# Altium PCB STRWL-P01-V01-3V3Plane.PcbDoc
Units mm, origin at the board's own origin, x right, y up, seen from the top; angles counter-clockwise.
Board outline 66.42 x 78.1 mm, 2 copper layers (Top Layer, Bottom Layer); 108 components, 76 nets, 391 pads, 110 vias.
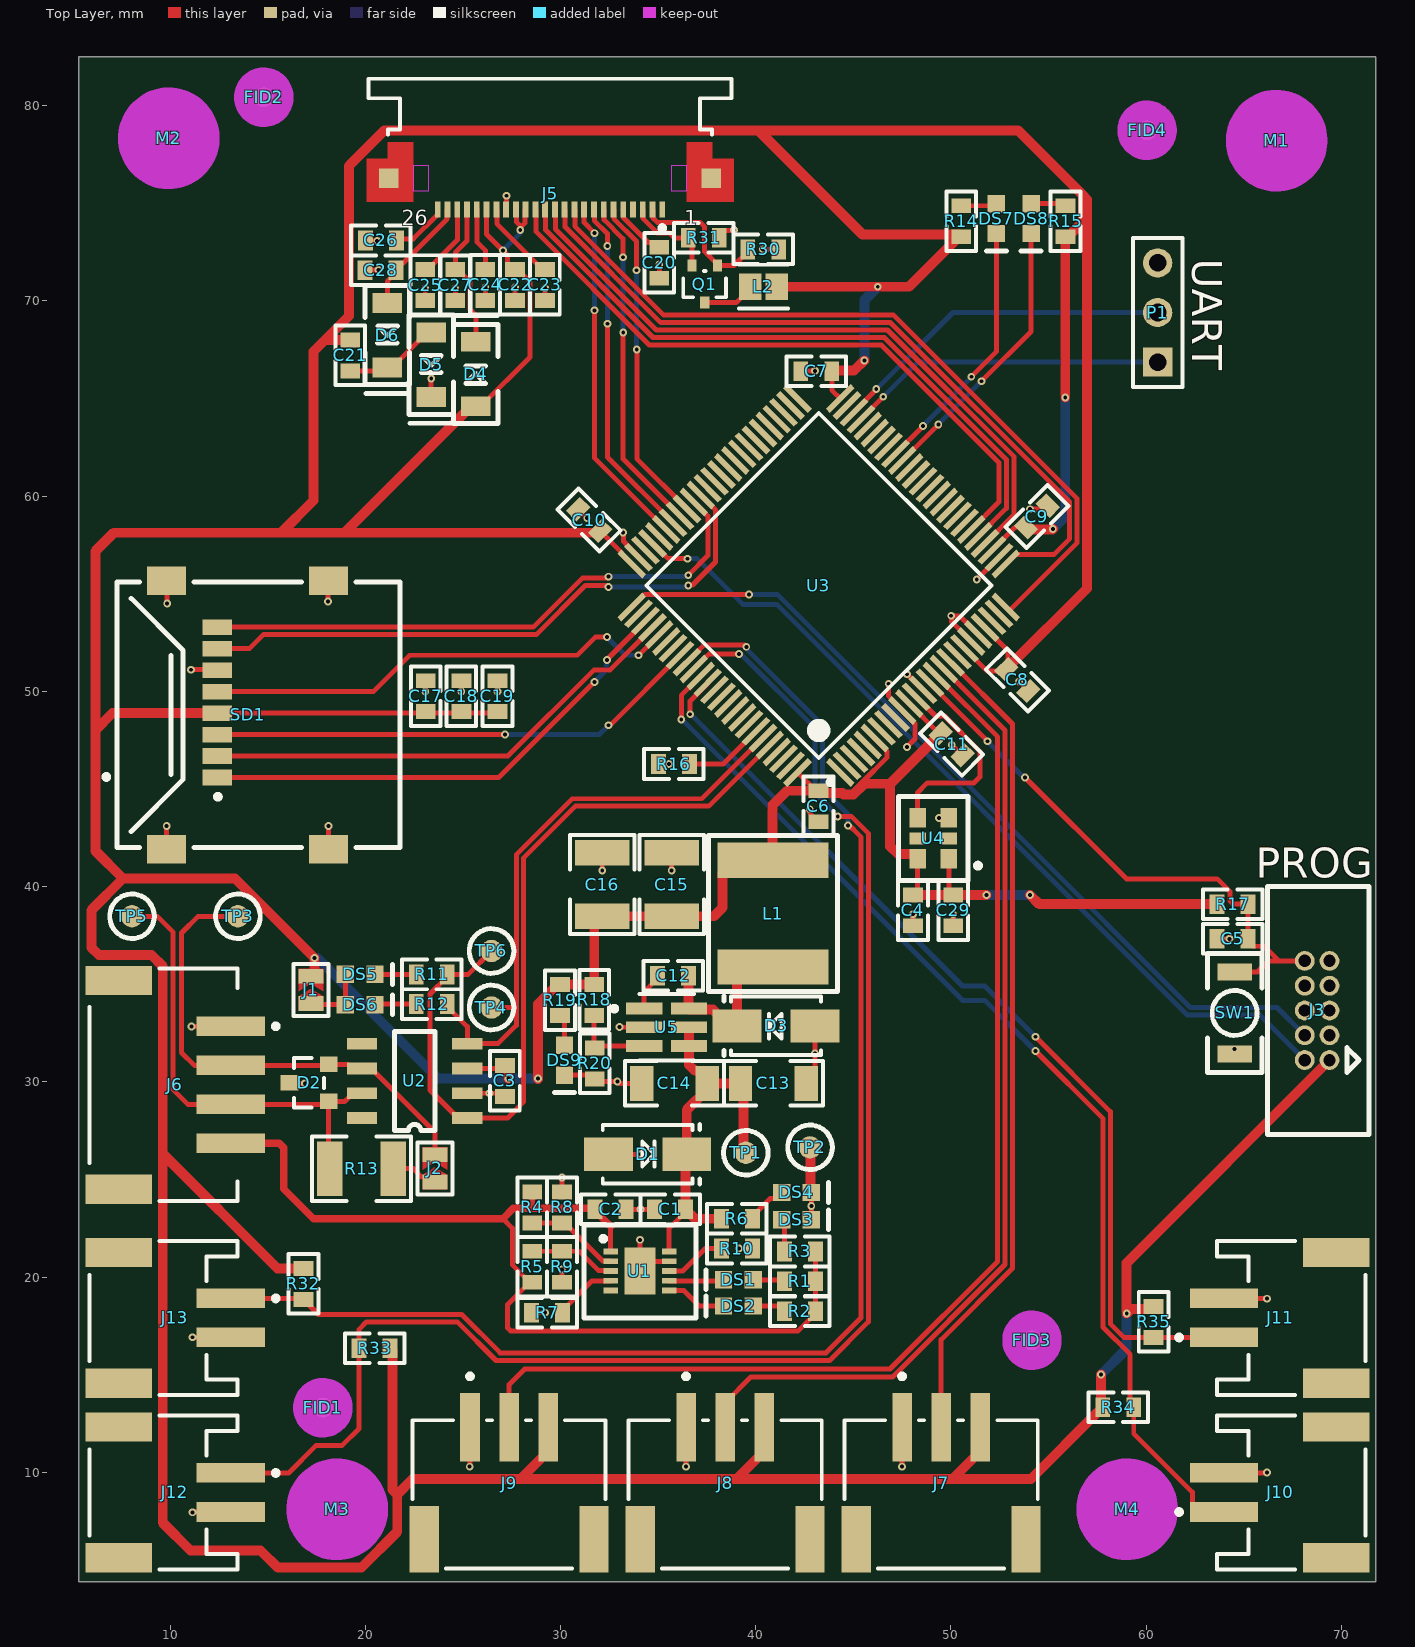
[diagram p0: Top Layer view]
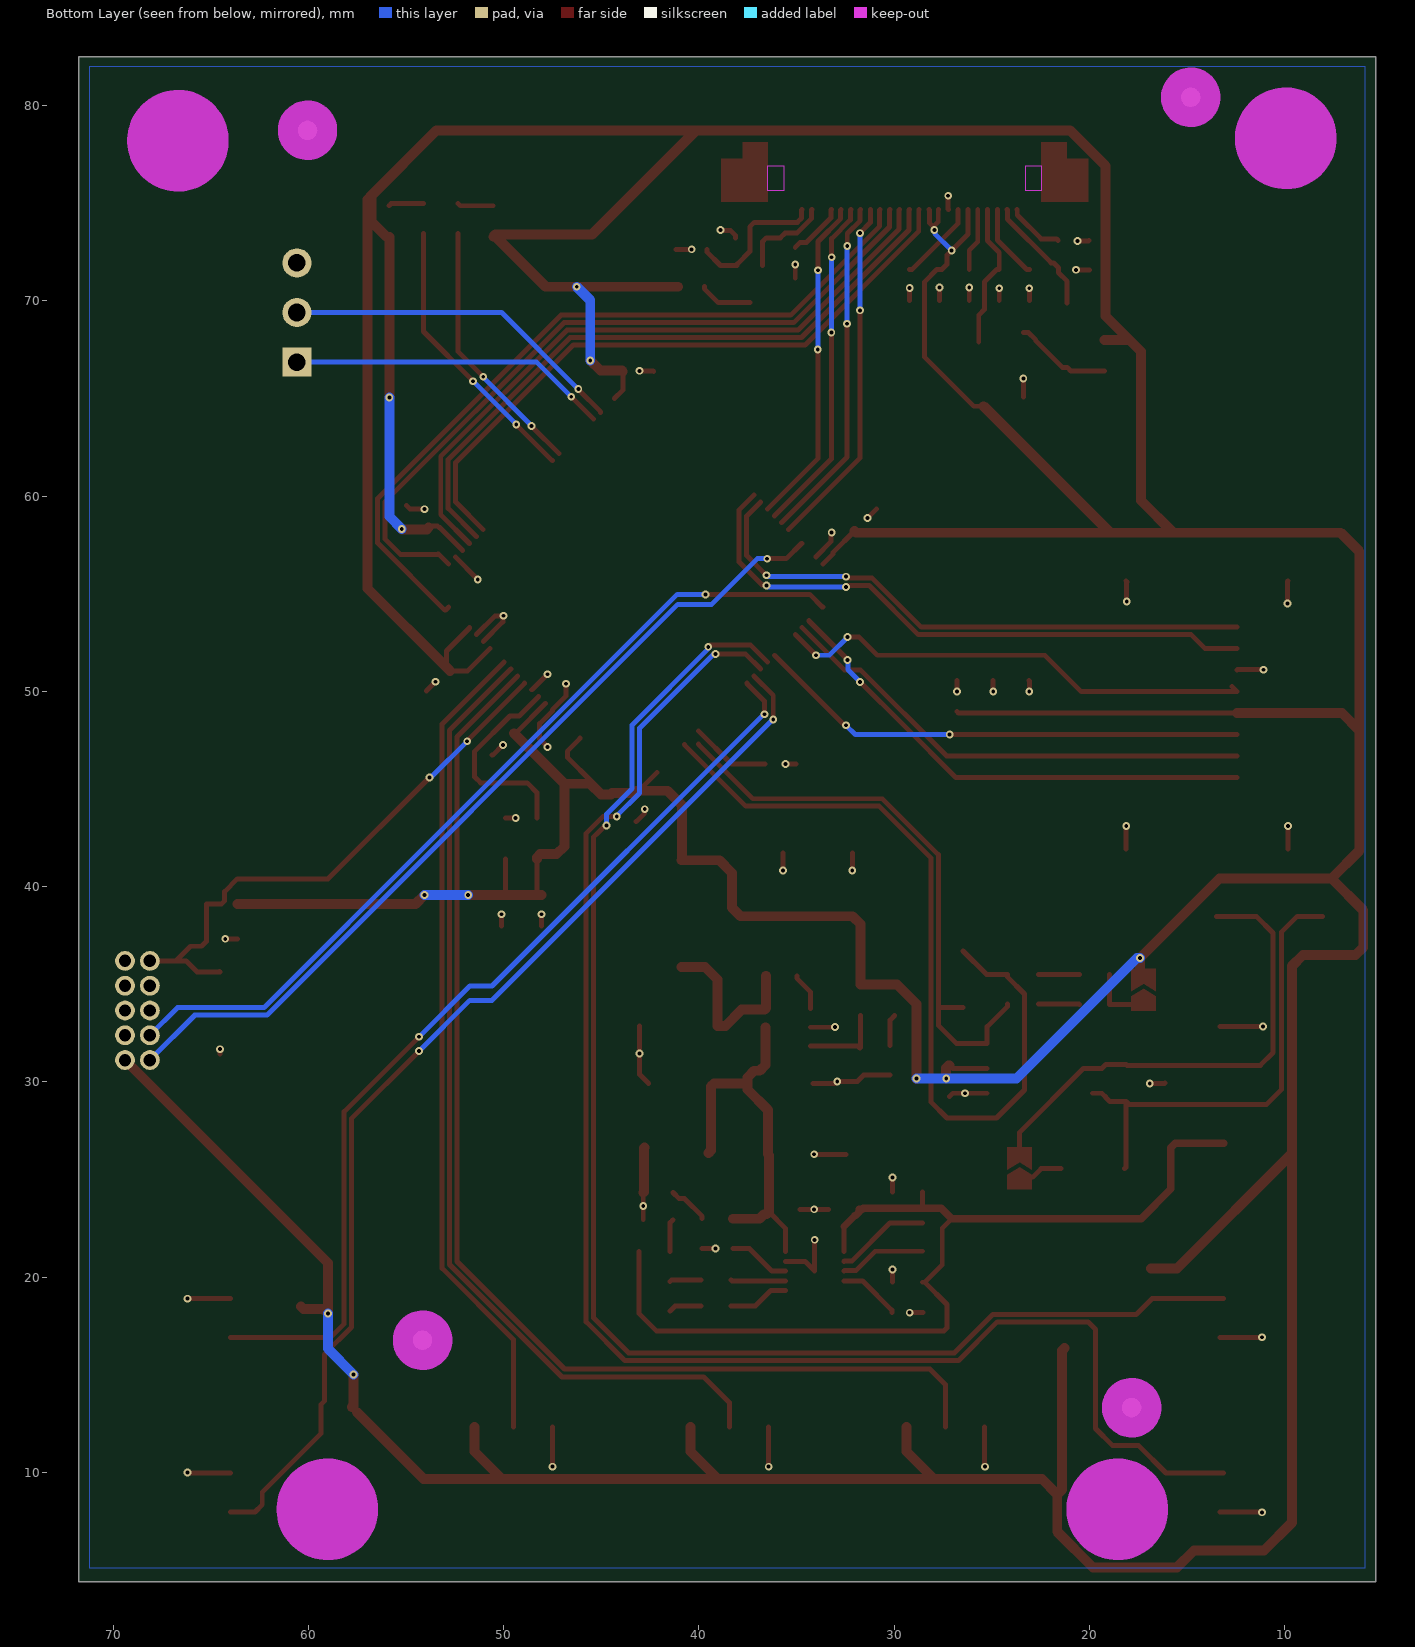
[diagram p1: Bottom Layer view, seen from below]
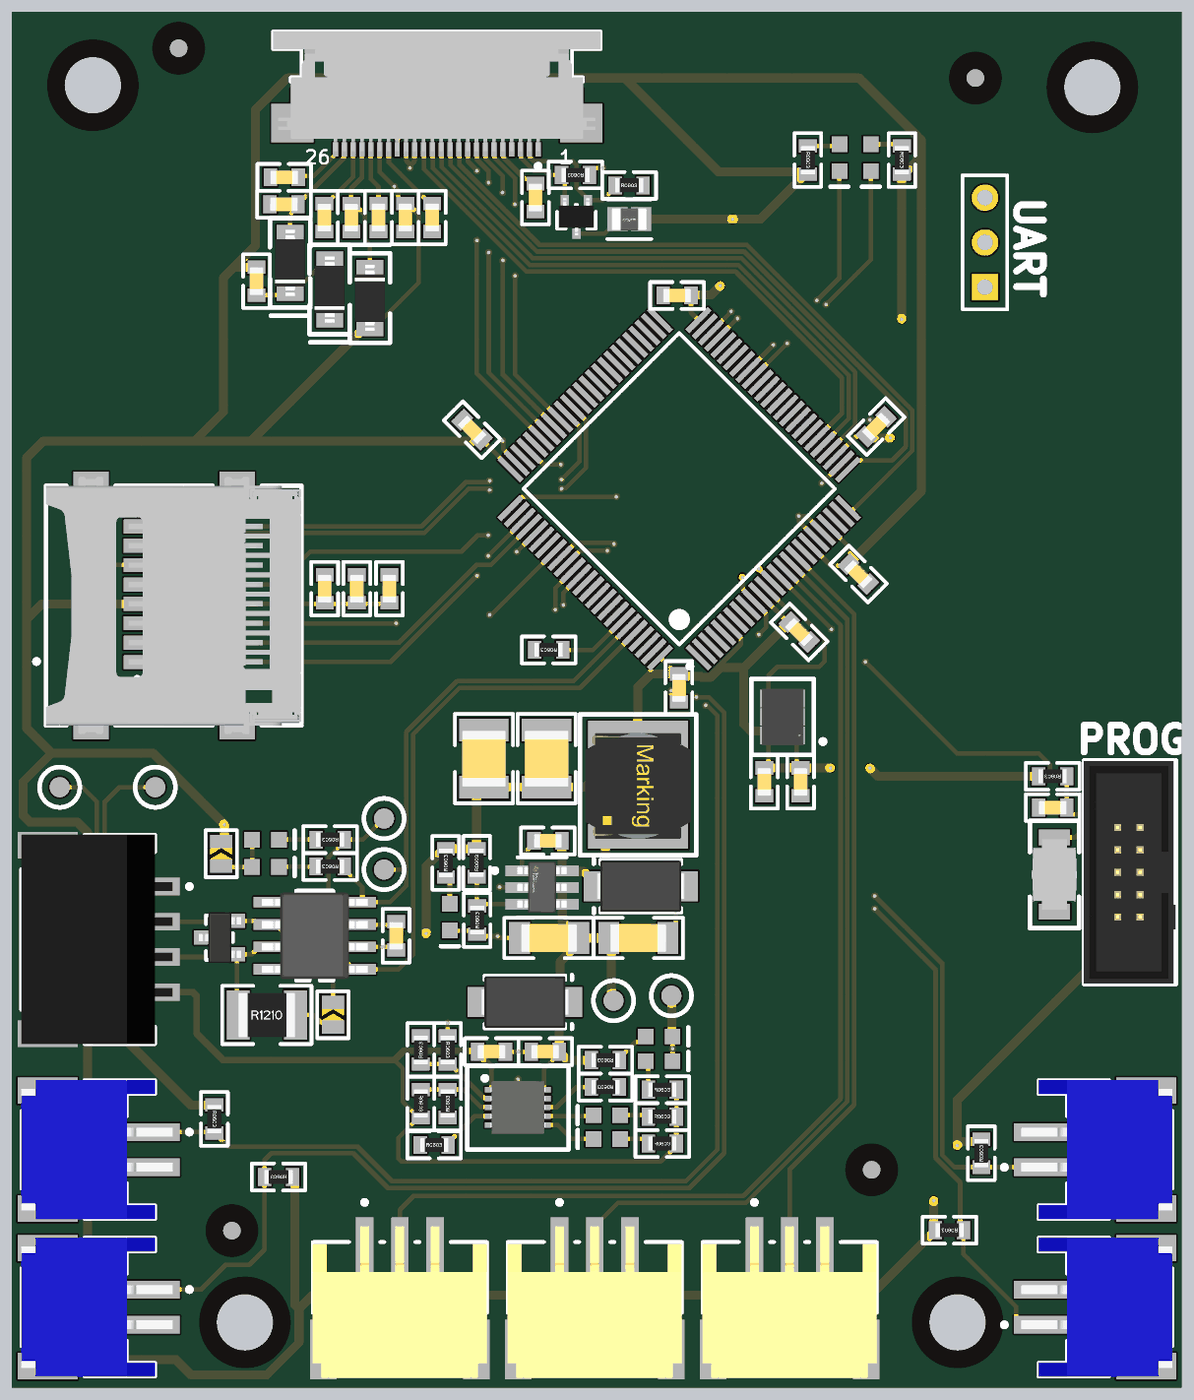
[diagram p2: 3D render of the assembled board from above, using the file's embedded part models]

## Layer stack, top to bottom
Top Solder: solder mask 0.0102, Solder Resist, Dk 3.5
Top Layer: signal copper 0.0356
Dielectric 1: dielectric 0.32, FR-4, Dk 4.8
Bottom Layer: signal copper 0.0356
Bottom Solder: solder mask 0.0102, Solder Resist, Dk 3.5

## Board outline
5.334,4.394 71.755,4.394 71.755,82.499 5.334,82.499

## Design rules (kind name [scope] priority, off if disabled: settings)
Clearance [All] p1: gap=0.127 ignorepadtopadclearanceinfootprint=TRUE
PolygonConnect [All] p1: connectstyle=Relief reliefconductorwidth=0.254 reliefentries=4 polygonreliefangle="90 Angle" airgapwidth=0.254
RoutingVias [All] p1: holewidth=0.2 width=0.4 viastyle="Through Hole" minholewidth=0.2 minwidth=0.4 maxholewidth=0.2 maxwidth=0.4
SilkToSilkClearance [All] p1: silktosilkclearance=0.025
SolderMaskExpansion SolderMaskExpansion_vIA [iSvIA] p1: expansion=0.102
SolderMaskExpansion [All] p2: expansion=0.102
Width [All] p1: maxlimit=0.508 minlimit=0.127 preferedwidth=0.254
29 further rules are at their usual default settings.

## Classes and differential pairs
component class U_STRWL-S06-V00-Peripherals: C17 C18 C19 SD1
component class U_STRWL-S05-V00-Master-PSU3V3-300mA: C12 C13 C14 C15 C16 D3 DS9 L1 R18 R19 R20 U5
component class U_STRWL-S04-V00-Microcontroller: C4 C5 C6 C7 C8 C9 C10 C11 C29 DS7 DS8 J3 P1 R14 R15 R16 R17 SW1 U3 U4
component class U_STRWL-S03-V00-CAN_MAIN: C3 D2 DS6 J1 J2 R12 R13 TP3 TP4 TP5 TP6 U2
component class U_STRWL-S02-V00-12VProtection: 2 C1 C2 D1 DS1 DS2 DS3 DS4 R1 R2 R3 R4 R5 R6 R7 R8 R9 TP1 TP2 U1
component class STRWL-S01-V01-Master1: C20 C21 C22 C23 C24 C25 C26 C27 C28 D4 D5 D6 FID1 FID2 FID3 FID4 J5 J6 J7 J8 J9 J10 J11 J12 J13 L2 LOGO1 M1 M2 M3 M4 Q1 R30 R31 R32 R33 R34 R35

## Components (designator, comment, footprint, x,y, rotation, side; value= is the part's Value field where it differs from the comment)
C1 "4u7 50V 5%" Cap_Ceramic_0603 35.617,23.47 r0 top
C2 "470nF 50V 5%" Cap_Ceramic_0603 32.569,23.47 r180 top
C3 "100nF 50V 5% X7R 0603" Cap_Ceramic_0603 27.153,30.048 r270 top
C4 "100nF 50V 5% X7R 0603" Cap_Ceramic_0603 48.057,38.786 r90 top
C5 "100nF 50V 5% X7R 0603" Cap_Ceramic_0603 64.43,37.325 r0 top
C6 "100nF 50V 5% X7R 0603" Cap_Ceramic_0603 43.213,44.119 r90 top
C7 "100nF 50V 5% X7R 0603" Cap_Ceramic_0603 43.104,66.396 r0 top
C8 "100nF 50V 5% X7R 0603" Cap_Ceramic_0603 53.401,50.584 r135 top
C9 "100nF 50V 5% X7R 0603" Cap_Ceramic_0603 54.407,58.953 r225 top
C10 "100nF 50V 5% X7R 0603" Cap_Ceramic_0603 31.471,58.776 r315 top
C11 "4u7" Cap_Ceramic_0603 50.038,47.295 r135 top
C12 "100nF 50V 5% X7R 0603" Cap_Ceramic_0603 35.773,35.433 r0 top
C13 "22uF 35V" Cap_Ceramic_1206 40.904,29.921 r0 top
C14 "22uF 35V" Cap_Ceramic_1206 35.837,29.921 r180 top
C15 "47uF 16V 1210" Cap_Ceramic_1210 35.697,40.106 r270 top
C16 "47uF 16V 1210" Cap_Ceramic_1210 32.141,40.106 r270 top
C17 "4u7" Cap_Ceramic_0603 23.1,49.754 r270 top
C18 "1uF" Cap_Ceramic_0603 24.923,49.754 r270 top
C19 "100nF 50V 5% X7R 0603" Cap_Ceramic_0603 26.773,49.754 r270 top
C20 "1uF 25V 5% X7R 0603" Cap_Ceramic_0603 35.064,71.955 r90 top
C21 "4u7 50V 5% X7R 0603" Cap_Ceramic_0603 19.228,67.208 r90 top
C22 "1uF 25V 5% X7R 0603" Cap_Ceramic_0603 27.674,70.825 r90 top
C23 "1uF 25V 5% X7R 0603" Cap_Ceramic_0603 29.201,70.825 r90 top
C24 "1uF 25V 5% X7R 0603" Cap_Ceramic_0603 26.151,70.825 r90 top
C25 "1uF 25V 5% X7R 0603" Cap_Ceramic_0603 23.074,70.816 r90 top
C26 "1uF 25V 5% X7R 0603" Cap_Ceramic_0603 20.803,73.101 r0 top
C27 "1uF 25V 5% X7R 0603" Cap_Ceramic_0603 24.613,70.815 r90 top
C28 "1uF 25V 5% X7R 0603" Cap_Ceramic_0603 20.783,71.574 r0 top
C29 "100nF 50V 5% X7R 0603" Cap_Ceramic_0603 50.117,38.786 r90 top
D1 "1N4448WQ-7-F" SMA 34.468,26.289 r0 top
D2 "NUP2105L" NUP2105L 17.12,29.947 r90 top
D3 "B260A-13-F" SMA 41.044,32.867 r180 top
D4 "STPS0530Z" SOD123 25.664,66.256 r90 top
D5 "STPS0530Z" SOD123 23.38,66.734 r270 top
D6 "STPS0530Z" SOD123 21.133,68.25 r270 top
DS1 "LED Red 0603" "LED RED 0603" 39.116,19.861 r180 top
DS2 "LED Red 0603" "LED RED 0603" 39.116,18.517 r180 top
DS3 "LED Green 0603" "LED GREEN 0603" 42.088,22.936 r0 top
DS4 "LED Green 0603" "LED GREEN 0603" 42.088,24.333 r0 top
DS5 "LED Blue 0603" "LED BLUE 0603" 19.739,35.506 r0 top
DS6 "LED Blue 0603" "LED BLUE 0603" 19.739,33.95 r0 top
DS7 "LED Orange" "LED ORANGE 0603" 52.328,74.22 r270 top
DS8 "LED Orange" "LED ORANGE 0603" 54.107,74.22 r270 top
DS9 "LED Green 0603" "LED GREEN 0603" 30.204,31.109 r270 top
FID1 "Fiducial 1MM" "FIDUCIAL 1MM" 17.831,13.31 r0 top
FID2 "Fiducial 1MM" "FIDUCIAL 1MM" 14.805,80.432 r90 top
FID3 "Fiducial 1MM" "FIDUCIAL 1MM" 54.153,16.764 r90 top
FID4 "Fiducial 1MM" "FIDUCIAL 1MM" 60.046,78.74 r90 top
J1 "Jumper 2Way Solderable" Jumper_2Way_Solderable 17.221,34.011 r0 top
J2 "Jumper 2Way Solderable" Jumper_2Way_Solderable 23.571,24.867 r0 top
J3 "IDC 10P 2x5 1.27mm" "IDC 1.27MM 10P" 68.758,33.655 r90 top
J5 "52437-2471" MOLX-52437-2471 29.464,75.482 r180 top locked
J6 "JST PH 4 Way SMD Header" "JST 4P SMD" 9.665,29.846 r90 top
J7 "JST PH 3 Way SMD Header" "JST 3P SMD" 49.498,8.864 r0 top
J8 "JST PH 3 Way SMD Header" "JST 3P SMD" 38.432,8.864 r0 top
J9 "JST PH 3 Way SMD Header" "JST 3P SMD" 27.366,8.864 r0 top
J10 "JST PH 2 Way SMD Header" "JST 2P SMD" 67.437,8.966 r90 top
J11 "JST PH 2 Way SMD Header" "JST 2P SMD" 67.437,17.907 r90 top
J12 "JST PH 2 Way SMD Header" "JST 2P SMD" 9.667,8.966 r270 top
J13 "JST PH 2 Way SMD Header" "JST 2P SMD" 9.667,17.907 r270 top
L1 "74404064221" Inductor_6x6mm 40.892,38.557 r90 top
L2 "LQM21FN100M70L" Murata_LQM21FN_70_IPC_C 40.392,70.728 r180 top
LOGO1 "50mm Wide QUTMS Logo" "QUTMS LOGO 50MM" 123.876,67.615 r180 bottom
M1 "Hole M3 Tight Unplated" "M3.2 UNPLATED" 66.684,78.211 r0 top
M2 "Hole M3 Tight Unplated" "M3.2 UNPLATED" 9.937,78.33 r0 top
M3 "Hole M3 Tight Unplated" "M3.2 UNPLATED" 18.567,8.103 r0 top
M4 "Hole M3 Tight Unplated" "M3.2 UNPLATED" 59.03,8.103 r0 top
P1 "Header 3" HDR1X3 60.588,66.867 r90 top
Q1 "MOSFET N-CH 30V 4A SOT323" Diodes_SOT323_0 37.389,70.866 r180 top
R1 "4k7 5% 0603" Res_ThinFilm_0603 42.265,19.783 r0 top
R2 "4k7 5% 0603" Res_ThinFilm_0603 42.265,18.252 r0 top
R3 "4k7 5% 0603" Res_ThinFilm_0603 42.266,21.311 r0 top
R4 "2M2 1%" Res_ThinFilm_0603 28.556,23.567 r90 top
R5 "2M2 1%" Res_ThinFilm_0603 28.556,20.528 r270 top
R6 "4k7 5% 0603" Res_ThinFilm_0603 39.04,22.987 r180 top
R7 "150k 5% 0603" Res_ThinFilm_0603 29.318,18.176 r0 top
R8 "390k 5%" Res_ThinFilm_0603 30.08,23.567 r270 top
R9 "240k 5%" Res_ThinFilm_0603 30.08,20.528 r90 top
R10 "1k 5% 0603" Res_ThinFilm_0603 39.04,21.463 r180 top
R11 "330R" Res_ThinFilm_0603 23.406,35.506 r180 top
R12 "330R" Res_ThinFilm_0603 23.407,33.98 r180 top
R13 "120R 1% 1210" Res_ThinFilm_1210 19.812,25.552 r0 top
R14 "330R" Res_ThinFilm_0603 50.533,74.082 r270 top
R15 "330R" Res_ThinFilm_0603 55.871,74.082 r270 top
R16 "10k 1% 0603" Res_ThinFilm_0603 35.814,46.279 r180 top
R17 "4k7" Res_ThinFilm_0603 64.43,39.1 r180 top
R18 "64k9 1%" Res_ThinFilm_0603 31.728,34.194 r90 top
R19 "1k" Res_ThinFilm_0603 29.976,34.185 r90 top
R20 "19k6 1%" Res_ThinFilm_0603 31.754,30.943 r90 top
R30 "10k 1% 0603" Res_ThinFilm_0603 40.386,72.643 r0 top
R31 "0R47 5% 0603" Res_ThinFilm_0603 37.337,73.234 r180 top
R32 "10k 5% 0603" Res_ThinFilm_0603 16.835,19.648 r270 top
R33 "10k 5% 0603" Res_ThinFilm_0603 20.478,16.358 r180 top
R34 "10k 5% 0603" Res_ThinFilm_0603 58.572,13.335 r180 top
R35 "10k 5% 0603" Res_ThinFilm_0603 60.383,17.706 r90 top
SD1 "47219-2001" 47219-2001 13.976,48.793 r90 top
SW1 "B3U-1000P" "BTN B3U-1000P" 64.532,33.528 r90 top
TP1 "TestPoint" TestPointSMD 39.497,26.365 r180 top
TP2 "TestPoint" TestPointSMD 42.782,26.645 r0 top
TP3 "TestPoint_SMD" TestPointSMD 13.478,38.481 r90 top
TP4 "TestPoint_SMD" TestPointSMD 26.467,33.807 r90 top
TP5 "TestPoint_SMD" TestPointSMD 8.052,38.481 r90 top
TP6 "TestPoint_SMD" TestPointSMD 26.467,36.703 r90 top
U1 "MAX17612A" MAX17612A 34.067,20.308 r0 top
U2 "SN65HVD233" SN65HVD233DR 22.53,30.048 r180 top
U3 "STM32F207VGT7" STM-LQFP100_N 43.231,55.423 r135 top
U4 "DSC1101CI5-020.0000T" VDFN6_3P2X2P5_MCH 49.098,42.469 r180 top
U5 "LMR14010ADDCR" Texas_Instruments_DDC0006A_IPC_A 35.437,32.797 r0 top

## Footprints (in the part's own frame and the unit in brackets; to place one, negate y for a bottom-side part, rotate by r counter-clockwise, add the part's x,y. Pads: shape width x height; smd on the part's side, far side on the other; paste and mask are expansions set on the pad)
47219-2001 [mm]
  rect 0.8x1.5 smd: 1(-3.205,1.55) 2(-2.105,1.55) 3(-1.005,1.55) 4(0.095,1.55) 5(1.195,1.55) 6(2.295,1.55) 7(3.395,1.55) 8(4.495,1.55)
  rect 1.45x2 smd: 9(6.875,4.15) 10(6.875,-4.15) 11(-6.875,-4.15) 12(-6.875,4.15)
  silkscreen extent -6.8,-7.8 6.8,7.36, body extent -7.3,-7.79 7.3,6.71, height 1.91
"BTN B3U-1000P" [mil] "OMRON B3U-1000P"
  rect 35x70 smd: 1(-82.68,0) 2(82.68,0)
  silkscreen extent -120,-55 120,55, body extent -79,-49 79,49, height 63
Cap_Ceramic_0603 [mil]
  rect 30x40 smd: 1(-31.24,0) 2(31.24,0)
  silkscreen extent -60,-30 60,30, body extent -31,-16 32,16, height 33
Cap_Ceramic_1206 [mil]
  rect 47x71 smd: 1(-66.08,0) 2(66.08,0)
  silkscreen extent -100,-45 100,45, body extent -63,-31 63,32, height 53
Cap_Ceramic_1210 [mm]
  rect 1.3x2.8 smd: 1(-1.625,0) 2(1.625,0)
  silkscreen extent -2.54,-1.65 2.54,1.65, body extent -1.6,-1.25 1.6,1.25, height 1.35
Diodes_SOT323_0 [mm]
  rect 0.47x0.6 smd paste+0 mask+0: 1(0,0.95) 2(-0.65,-0.95) 3(0.65,-0.95)
  silkscreen extent -1.1,-0.67 1.1,0.67, body extent -1.35,-1.2 1.35,1.2, height 0.25
"FIDUCIAL 1MM" [mm]
  round 1 smd mask+1: 1(0,0)
  round 1 smd far side mask+1: 1(0,0)
  Keep-Out Layer circle w1.524: c0,0 r0.762
HDR1X3 [mm] "Connector; Header; 3 Position"
  rect 1.5x1.5 hole 0.9: 1(0,0)
  round 1.5 hole 0.9: 2(2.54,0) 3(5.08,0)
  silkscreen extent -1.27,-1.27 6.35,1.27
"IDC 1.27MM 10P" [mil]
  round 40 hole 25: 1(-100,-25) 2(-100,25) 3(-50,-25) 4(-50,25) 5(0,-25) 6(0,25) 7(50,-25) 8(50,25) 9(100,-25) 10(100,25)
  silkscreen extent -250,-105 250,100, body extent -249,-104 249,100, height 214
Inductor_6x6mm [mm]
  rect 1.8x5.7 smd: 1(-2.667,0) 2(2.794,0)
  silkscreen extent -3.94,-3.3 4.06,3.3, body extent -3,-3 3,3, height 4.56
"JST 2P SMD" [mm] "SMD, 2-Leads, Body 7.9x7.6mm, Pitch 2mm"
  rect 1x3.5 smd: 1(-1,3.45) 2(1,3.45)
  rect 1.5x3.4 smd: MP1(-3.35,-2.3) MP2(3.35,-2.3)
  silkscreen extent -3.95,-3.8 3.95,5.87, body extent -3.95,-3.8 3.95,4.8, height 5.6
"JST 3P SMD" [mm]
  rect 1x3.5 smd paste+0 mask+0: 1(-2,3.45) 2(0,3.45) 3(2,3.45)
  rect 1.5x3.4 smd paste+0 mask+0: 4(4.35,-2.3) 5(-4.35,-2.3)
  silkscreen extent -4.95,-3.8 4.95,6.17, body extent -5.2,-4.1 5.2,5.3, height 0.25
"JST 4P SMD" [mm]
  rect 1x3.5 smd paste+0 mask+0: 1(3,-3.45) 2(1,-3.45) 3(-1,-3.45) 4(-3,-3.45)
  rect 1.5x3.4 smd paste+0 mask+0: 5(-5.35,2.3) 6(5.35,2.3)
  silkscreen extent -5.95,-5.88 5.95,3.8, body extent -6.2,-5.3 6.2,4.1, height 0.25
Jumper_2Way_Solderable [mil]
  rect 50x30 smd: 1(0,55) 2(0,0)
  Top Layer region: -25,25 0,40 25,25 25,70 -25,70
  Top Layer region: -25,15 0,30 25,15 25,-15 0,-15 -25,-15
  silkscreen extent -35,-25 35,80
"LED BLUE 0603" [mil]
  rect 35x35 smd: 1(-30,0) 2(30,0)
  silkscreen extent 65,-20 65,20, body extent -40,-20 40,20, height 30
"LED GREEN 0603" [mil]
  rect 35x35 smd: 1(-30,0) 2(30,0)
  silkscreen extent 65,-20 65,20, body extent -40,-20 40,20, height 30
"LED ORANGE 0603" [mil]
  rect 35x35 smd: 1(-30,0) 2(30,0)
  silkscreen extent 65,-20 65,20, body extent -40,-20 40,20, height 30
"LED RED 0603" [mil]
  rect 35x35 smd: 1(-30,0) 2(30,0)
  silkscreen extent 65,-20 65,20, body extent -40,-20 40,20, height 30
"M3.2 UNPLATED" [mm]
  round 0 hole 3.2 unplated mask+2.6: 1(0,0)
  Keep-Out Layer circle w2.667: c0,0 r1.27
MAX17612A [mm]
  rect 0.75x0.3 smd: 1(-1.5,1) 2(-1.5,0.5) 3(-1.5,0) 4(-1.5,-0.5) 5(-1.5,-1) 6(1.5,-1) 7(1.5,-0.5) 8(1.5,0) 9(1.5,0.5) 10(1.5,1)
  rect 1.6x2.4 smd: 11(0,0)
  silkscreen extent -2.87,-2.4 2.87,2.35, body extent -1.55,-1.5 1.55,1.5, height 0.8
MOLX-52437-2471 [mm] "FPC Connector, 24-Leads, Right Angle, Pitch 0.5 mm, SMT"
  rect 0.3x0.8 smd: 1(-5.75,0.8) 2(-5.25,0.8) 3(-4.75,0.8) 4(-4.25,0.8) 5(-3.75,0.8) 6(-3.25,0.8) 7(-2.75,0.8) 8(-2.25,0.8) 9(-1.75,0.8) 10(-1.25,0.8) 11(-0.75,0.8) 12(-0.25,0.8) 13(0.25,0.8) 14(0.75,0.8) 15(1.25,0.8) 16(1.75,0.8) 17(2.25,0.8) 18(2.75,0.8) 19(3.25,0.8) 20(3.75,0.8) 21(4.25,0.8) 22(4.75,0.8) 23(5.25,0.8) 24(5.75,0.8)
  rect 1x1 smd: MP1(-8.25,-0.8) MP2(8.25,-0.8)
  Top Layer region: 7,0.4 9.4,0.4 9.4,-1.8 8.3,-1.8 8.3,-2.65 7,-2.65
  Top Layer region: -7,0.4 -9.4,0.4 -9.4,-1.8 -8.3,-1.8 -8.3,-2.65 -7,-2.65
  Keep-Out Layer region: 6.2,-1.45 7,-1.45 7,-0.15 6.2,-0.15
  Keep-Out Layer region: -6.2,-0.15 -7,-0.15 -7,-1.45 -6.2,-1.45
  silkscreen extent -9.3,-5.9 9.3,1.87, body extent -9.3,-5.9 9.3,0.9, height 2.05
Murata_LQM21FN_70_IPC_C [mm]
  rect 1.154x1.356 smd paste+0 mask+0: 1(-0.676,0) 2(0.676,0)
  silkscreen extent -1.25,-1.12 1.25,1.12, body extent -1.35,-0.82 1.35,0.82, height 0.25
NUP2105L [mm]
  rect 0.8x0.9 smd: 1(-0.95,-1) 2(0.95,-1) 3(0,1)
  silkscreen extent -1.27,-0.76 1.27,0.76, body extent -1.45,-1.22 1.45,1.18, height 1
"QUTMS LOGO 50MM" [mm]
  silkscreen extent 0.01,0 50.03,16.76
Res_ThinFilm_0603 [mil]
  rect 30x40 smd: 1(-31.24,0) 2(31.24,0)
  silkscreen extent -60,-30 60,30, body extent -31,-16 32,16, height 18
Res_ThinFilm_1210 [mm]
  rect 1.3x2.8 smd: 1(-1.625,0) 2(1.625,0)
  silkscreen extent -2.54,-1.65 2.54,1.65, body extent -1.6,-1.25 1.6,1.25, height 0.6
SMA [mm]
  rect 2.5x1.7 smd: A(-2,0) K(2,0)
  silkscreen extent -2.3,-1.52 2.67,1.52, body extent -2.52,-1.46 2.52,1.46, height 2.4
SN65HVD233DR [mm]
  rect 1.55x0.6 smd: 1(-2.7,1.903) 2(-2.7,0.633) 3(-2.7,-0.637) 4(-2.7,-1.907) 5(2.7,-1.907) 6(2.7,-0.637) 7(2.7,0.633) 8(2.7,1.903)
  silkscreen extent -1.04,-2.54 1.04,2.54, body extent -3.01,-2.45 3.01,2.45, height 1.63
SOD123 [mil]
  rect 40x60 smd: A(-65,0) K(65,0)
  silkscreen extent -100,-45 118,45, body extent -74,-33 74,33, height 47
STM-LQFP100_N [mm] "Thin QFP, 100-Leads, Body 14x14mm, Pitch 0.5mm, IPC Medium Density"
  rect 1.8x0.3 smd: 1(-7.55,6) 2(-7.55,5.5) 3(-7.55,5) 4(-7.55,4.5) 5(-7.55,4) 6(-7.55,3.5) 7(-7.55,3) 8(-7.55,2.5) 9(-7.55,2) 10(-7.55,1.5) 11(-7.55,1) 12(-7.55,0.5) 13(-7.55,0) 14(-7.55,-0.5) 15(-7.55,-1) 16(-7.55,-1.5) 17(-7.55,-2) 18(-7.55,-2.5) 19(-7.55,-3) 20(-7.55,-3.5) 21(-7.55,-4) 22(-7.55,-4.5) 23(-7.55,-5) 24(-7.55,-5.5) 25(-7.55,-6) 51(7.55,-6) 52(7.55,-5.5) 53(7.55,-5) 54(7.55,-4.5) 55(7.55,-4) 56(7.55,-3.5) 57(7.55,-3) 58(7.55,-2.5) 59(7.55,-2) 60(7.55,-1.5) 61(7.55,-1) 62(7.55,-0.5) 63(7.55,0) 64(7.55,0.5) 65(7.55,1) 66(7.55,1.5) 67(7.55,2) 68(7.55,2.5) 69(7.55,3) 70(7.55,3.5) 71(7.55,4) 72(7.55,4.5) 73(7.55,5) 74(7.55,5.5) 75(7.55,6)
  rect 0.3x1.8 smd: 26(-6,-7.55) 27(-5.5,-7.55) 28(-5,-7.55) 29(-4.5,-7.55) 30(-4,-7.55) 31(-3.5,-7.55) 32(-3,-7.55) 33(-2.5,-7.55) 34(-2,-7.55) 35(-1.5,-7.55) 36(-1,-7.55) 37(-0.5,-7.55) 38(0,-7.55) 39(0.5,-7.55) 40(1,-7.55) 41(1.5,-7.55) 42(2,-7.55) 43(2.5,-7.55) 44(3,-7.55) 45(3.5,-7.55) 46(4,-7.55) 47(4.5,-7.55) 48(5,-7.55) 49(5.5,-7.55) 50(6,-7.55) 76(6,7.55) 77(5.5,7.55) 78(5,7.55) 79(4.5,7.55) 80(4,7.55) 81(3.5,7.55) 82(3,7.55) 83(2.5,7.55) 84(2,7.55) 85(1.5,7.55) 86(1,7.55) 87(0.5,7.55) 88(0,7.55) 89(-0.5,7.55) 90(-1,7.55) 91(-1.5,7.55) 92(-2,7.55) 93(-2.5,7.55) 94(-3,7.55) 95(-3.5,7.55) 96(-4,7.55) 97(-4.5,7.55) 98(-5,7.55) 99(-5.5,7.55) 100(-6,7.55)
  silkscreen extent -7.67,-6.25 6.25,6.82, body extent -7,-7 7,7, height 1.6
TestPointSMD [mil]
  round 45 smd: 1(0,0)
  silkscreen extent -45,-45 45,45
Texas_Instruments_DDC0006A_IPC_A [mm]
  rect 1.854x0.612 smd paste+0 mask+0: 1(-1.15,0.95) 2(-1.15,0) 3(-1.15,-0.95) 4(1.15,-0.95) 5(1.15,0) 6(1.15,0.95)
  silkscreen extent -2.8,-1.7 1.4,1.7, body extent -2.58,-1.95 2.58,1.95, height 0.25
VDFN6_3P2X2P5_MCH [mm]
  rect 0.85x1 smd paste-0.425 mask+0: 1(-0.8,1.05) 3(-0.8,-1.05) 4(0.8,-1.05) 6(0.8,1.05)
  rect 0.85x0.6 smd paste+0 mask+0: 2(-0.8,0) 5(0.8,0)
  silkscreen extent -2.41,-2.16 1.78,2.16, body extent -1.25,-1.6 1.25,1.6, height 0.65

## Part data
C1 C11 C17: library part "4u7 50V 5% X7R 0603", "Capacitor, Ceramic, SMD, 4u7, 50V, 5%, X7R, 0603"
C2: library part "470nF 50V 5% X7R 0603", "Capacitor, Ceramic, SMD, 470nF, 50V, 5%, X7R, 0603"
C3 C4 C5 C6 C7 C8 C9 C10 C12 C19 C29: "Capacitor, Ceramic, SMD, 100nF, 50V, 5%, X7R, 0603"
C13 C14: library part "22uF 35V 20% X5R 1206", "22µF ±20% 35V Ceramic Capacitor X5R 1206 (3216 Metric)", ComponentLink1Description=Digikey, ComponentLink1URL=https://www.digikey.com.au/product-detail/en/tdk-corporation/C3216X5R1V226M160AC/445-8045-1-ND/2792165, ComponentLink2Description=Datasheet, ComponentLink2URL=https://product.tdk.com/info/en/catalog/datasheets/mlcc_commercial_general_en.pdf
C15 C16: library part "47uF 16V 10% X7R 1210", "Capacitor, Ceramic, SMD, 47uF, 16V, 5%, X7R, 1210"
C18: library part "1uF 25V 5% X7R 0603", "Capacitor, Ceramic, SMD, 1uF, 25V, 5%, X7R, 0603"
C20 C22 C23 C24 C25 C26 C27 C28: "Capacitor, Ceramic, SMD, 1uF, 25V, 5%, X7R, 0603"
C21: "Capacitor, Ceramic, SMD, 4u7, 50V, 5%, X7R, 0603"
D1: "Diode, SMD, 75V, 5%, 250mA, SOD123", Average Rectified Current=150mA, Forward Voltage=1V, Manufacturer="ON Semiconductor / Fairchild", Manufacturer Part Number=1N914BWS, Max Forward Surge Current (Ifsm)=4A, Max Operating Temperature=150°C, Max Repetitive Reverse Voltage (Vrrm)=75V, Max Reverse Leakage Current=5uA, Min Operating Temperature=-55°C, Package Quantity=1, Power Dissipation=200mW, Category="Rectifier Diodes", Contact Plating=Tin,Matte, Element Configuration=Single, Forward Current=150mA, Height=1mm, Lead Free="Lead Free", Length=1.8mm, Max Reverse Voltage (DC)=75V, Mount="Surface Mount", Number of Pins=2, Packaging="Tape and Reel", Peak Reverse Current=5uA, Radiation Hardening=No, REACH SVHC="No SVHC", Recovery Time=4ns, Reverse Recovery Time=4ns, Reverse Voltage=75V, Weight=0.0276g, Width=1.35mm
D3: "Diode, Schottky Barrier Rectifier, 60 V, 2 A, B260A-13-F"
D4 D5 D6: "Diode, Schottky Barrier Rectifier, 30 V, 0.5 A, STPS0530Z"
DS5 DS6: library part "LED BLUE 0603"
DS7 DS8: library part "LED ORANGE 0603"
J1 J2: library part "Jumper 2Way Side Solderable", "Jumper 2Way Side Solderable"
J5: "0.5 mm Pitch Easy-On(TM) Type FPC Connector, Right Angle, ZIF, SMT, Bottom Contact, 24 Circuits, -40 to 85 degC, ELV and RoHS Compliant, Tape and Reel", Current (Max per Contact)=0.5A, Manufacturer=Molex, Voltage (Max)=50V, Circuits (Loaded)=24, ComponentLink1Description="Manufacturer URL", ComponentLink1URL=http://www.molex.com/molex/index.jsp, ComponentLink2Description=Datasheet, ComponentLink2URL=http://www.molex.com/webdocs/datasheets/pdf/en-us/0524372471_FFC_FPC_CONNECTORS.pdf, ComponentLink3Description="Package Specification", ComponentLink3URL=http://www.molex.com/pdm_docs/sd/524372471_sd.pdf, Contact Position=Bottom, Durability (mating cycles max)=20, Entry Angle="90degrees Angle", Material - Metal="Phosphor Bronze", Material - Plating Mating=Gold, Material - Plating Termination=Gold, Mounting Technology="Surface Mount", Number of Rows=1, Orientation="Right Angle", PackageDescription="24-Lead FPC Connector, Pitch 0.5 mm", PackageReference=52437-2471, PackageVersion="Rev. E, 07/2013", Packing="Tape and Reel", PartNumber=52437-2471, PCB Locator=No, PCB Retention=None, Pitch - Mating Interface=0.50mm, Polarized to PCB=Yes, RoHS=TRUE, Stackable=No
J10 J11 J12 J13: Colour=Black, Current Rating="3 A", Max Operating Temperature=105degC, Min Operating Temperature=-65degC, Package Quantity=100, PartNumber=S2B-PH-SM4-TB(LF)(SN), ComponentLink1Description="Manufacturer URL", ComponentLink1URL=http://www.jst.com/home2.html, ComponentLink2Description=Datasheet, ComponentLink2URL=http://www.jst-mfg.com/product/pdf/eng/ePH.pdf, Contact Finish=Lead, Contact Material=Bronze, Contact Plating=Tin, DatasheetVersion=Dec-12, Height="8.13 mm", Lead Pitch="0.1 inch", Length="101.19 mm", Mount="Through Hole", PackageDescription="Male Header, Pitch 2 mm, 1 x 2 Position, Height 5.5 mm", PackageReference=S2B-PH-SM4-TB(LF)(SN)-2, Packaging=Bulk, Pins=40, Radiation Hardening=No, RoHSCompliant=True, Width="2.34 mm"
L1: "FIXED IND 220UH 660MA 850 MOHM", ComponentLink1Description=Digikey, ComponentLink1URL=https://www.digikey.com.au/product-detail/en/w%C3%BCrth-elektronik/74404064221/732-7261-1-ND/5353241, ComponentLink2Description="LCSC A", ComponentLink2URL=https://lcsc.com/product-detail/Power-Inductors_Sunlord-SWPA6045S221MT_C91047.html, ComponentLink3Description="LCSC B", ComponentLink3URL=https://lcsc.com/product-detail/Power-Inductors_SXN-Shun-Xiang-Nuo-Elec-SMNR6045-221MT_C467145.html
LOGO1: library part "QUTMS Logo 50mm"
M1 M2 M3 M4: "M3.2 Hole, No Plating"
P1: "Header, 3-Pin", LatestRevisionDate=17-Jul-2002, LatestRevisionNote="Re-released for DXP Platform.", Publisher="Altium Limited"
Q1: library part DMN3065LW-13, "N-Channel 30V 4A (Ta) 770mW (Ta) Surface Mount SOT-323"
R1 R2 R3 R6: "Resistor, SMD, 4k7, 0.1W, 5%, 0603"
R4 R5: library part "2M2 1% 0603", "Resistor, SMD, 2M2, 0.125W, 1%, 0603"
R7: library part "150k 5%, 0603", "Resistor, SMD, 150k, 0.1W, 5%, 0603"
R8: library part "390k 5% 0603", "Resistor, SMD, 390k, 0.1W, 5%, 0603"
R9: library part "240k 5% 0603", "Resistor, SMD, 240k, 0.1W, 5%, 0603"
R10: "Resistor, SMD, 1k, 0.1W, 5%, 0603"
R11 R12 R14 R15: library part "330R 5% 0603", "Resistor, SMD, 330R, 0.1W, 5%, 0603"
R13: "Resistor, SMD, 120R, 0.25W, 1%, 1210"
R16: library part "20k 1% 0603", "Resistor, SMD, 20k, 0.1W, 5%, 0603"
R17: library part "4k7 5% 0603", "Resistor, SMD, 4k7, 0.1W, 5%, 0603"
R18: library part "64k9 1% 0603", "Resistor, SMD, 64k9, 0.1W, 5%, 0603"
R19: library part "1k 5% 0603", "Resistor, SMD, 1k, 0.1W, 5%, 0603"
R20: library part "19k6 1% 0603", "Resistor, SMD, 19k6, 0.1W, 5%, 0603"
R30: "Resistor, SMD, 10k, 0.1W, 1%, 0603"
R31: library part "0R47 5% 0603_1", "Resistor, SMD, 0R, 0.1W, 5%, 0603"
R32 R33 R34 R35: "Resistor, SMD, 10k, 0.1W, 5%, 0603"
SD1: "MicroSD Card Connector, Hinge Type, -40 to 85 degC, 8-Pin SMD, RoHS, Tape and Reel"
SW1: library part "BTN B3U-1000P", "Omron B3U-1000P Ultra Miniture Switch", ComponentLink1Description=LCSC, ComponentLink1URL=https://lcsc.com/product-detail/Tactile-Switches_BRIGHT-TSA063G50-250_C294565.html
U1: "4.5V to 60V, 250mA Current-Limiter with OV, UV, and Reverse Protection", ComponentLink1Description=Datasheet, ComponentLink1URL=https://datasheets.maximintegrated.com/en/ds/MAX17612A-MAX17612C.pdf
U3: library part STM32F207VGT7-Custom, "ARM Cortex-M3 32-bit MCU, 1024 KB Flash, 128 KB Internal RAM, 82 I/Os, 100-pin LQFP, -40 to 105 degC, Tray", I/Os (High Current)=82, Operating Frequency(F) (Processor speed) (MHz)=120, Supply Voltage(Vcc) min (V)=1.8, ComponentLink1Description="Manufacturer URL", ComponentLink1URL=http://www.st.com/web/en/home.html, ComponentLink2Description=Datasheet, ComponentLink2URL=http://www.st.com/st-web-ui/static/active/en/resource/technical/document/datasheet/CD00237391.pdf, ComponentLink3Description="Package Specification", ComponentLink3URL=http://www.st.com/st-web-ui/static/active/en/resource/technical/document/data_brief/DM00071938.pdf, Core="ARM Cortex-M3", D/A Converter="2x12-bit (2 Channel)", DatasheetVersion="Rev. 9", FLASH Size (Prog) (kB)=1024, Internal RAM Size (kB)=128, Mounting Technology="Surface Mount", PackageDescription="100-Pin Low Profile Quad Flat Package, 14 x 14 mm Body, 0.5 mm Pitch", PackageReference=LQFP100, PackageVersion="Rev. 1, 06/2013", Packing=Tray, PartNumber=STM32F207VGT7
U4: "No Description Available", Built_By=EMA_Jessica, Copyright="Copyright (C) 2018 Accelerated Designs. All rights reserved", Manufacturer_Part_Number=DSC1101CI5-020.0000T, RefDes=RefDes, SourceLibrary=Microchip_2019-08-23_23, Type=DEV, Vendor=Microchip
D2: ComponentLink1Description=Datasheet, ComponentLink1URL=https://www.onsemi.cn/PowerSolutions/document/NUP2105L-D.PDF, ComponentLink2Description=LCSC, ComponentLink2URL=https://lcsc.com/product-detail/TVS_ON-Semiconductor-NUP2105LT1G_C14486.html, ComponentLink3Description=Digikey, ComponentLink3URL=https://www.digikey.com.au/product-detail/en/on-semiconductor/SZNUP2105LT1G/SZNUP2105LT1GOSCT-ND/3487669
U2: ComponentLink1Description=LCSC, ComponentLink1URL=https://lcsc.com/product-detail/CAN-ICs_Texas-Instruments_SN65HVD233DRG4_Texas-Instruments-Texas-Instruments-SN65HVD233DRG4_C61643.html, ComponentLink2Description=Digikey, ComponentLink2URL=https://www.digikey.com.au/product-detail/en/texas-instruments/SN65HVD233DR/296-35967-1-ND/4134960, ComponentLink3Description=Datasheet, ComponentLink3URL=https://www.ti.com/lit/ds/symlink/sn65hvd233.pdf?ts=1588560888178, ComponentLink4Description="Ti Product Page", ComponentLink4URL=https://www.ti.com/product/SN65HVD233

## Via types
v1: diameter 0.4, hole 0.2, Top Layer to Bottom Layer, tented both sides, 96 vias
v2: diameter 0.4, hole 0.2, Top Layer to Bottom Layer, 14 vias

## Nets (pads, with @x,y where several pads share a name; then routed paths per layer and width w, separated by ;. In a path a pad name is that pad's centre, name@x,y a point inside that pad or via, vN(x,y) a via of type N, cw(c..) or ccw(c..) an arc to the next point about the centre after c; other vN are vias at no path point)
3V3: C3.1 C4.2 C6.2 C7.2 C8.2 C9.2 C10.2 C11.2 C15.2 C16.2 C17.2 C18.2 C19.2 C21.2 C22.2 C29.2 D4.A J1.1 J3.1 J5.15 J5.16 J5.19 J7.3 J8.3 J9.3 L1.2 L2.1 R14.2 R15.2 R17.2 R18.2 R19.2 R32.1 R33.1 R34.2 R35.2 SD1.4 U2.3 U3.6 U3.11 U3.19 U3.22 U3.28 U3.50 U3.75 U3.100 U4.1 U4.6 | length 476.4
  Top Layer w0.254: SD1.4 23.1,48.888 24.923,48.888 26.701,48.888 C19.2 ; U2.3 26.996,30.685 C3.1 ; D4.A@25.41,64.605 D4.A 25.918,64.605 28.436,67.124 28.436,70.984 27.801,71.619 C22.2 27.547,71.619 27.293,71.873 27.293,72.343 v1(27.051,72.585) 26.214,73.421 J5.19 ; J5.16 27.737,74.659 27.737,74.05 27.988,73.799 28.191,74.002 28.191,74.659 J5.15 ; v1(27.939,73.633) v1@27.988,73.683 ; C10.2 33.119,57.127 33.119,57.049 U3.75 ; U3.100 42.157,45.842 C6.2@43.086,44.913 ; C6.2 43.307,44.818 44.44,44.818 44.936,44.818 45.474,45.357 46.737,46.62 46.737,46.934 46.095,47.577 U3.6 ; C7.2 43.897,65.434 U3.50 ; U3.11 49.384,47.856 C11.2 ; C4.2 48.298,39.821 U4.6 ; U4.1 49.898,39.798 C29.2 ; U3.19 51.841,51.055 C8.2@52.75,51.055 ; U3.22 51.751,53.249 52.929,52.071 C8.2@52.929,51.235 ; U3.28 53.271,58.392 53.307,58.392 53.397,58.482 53.756,58.482 C9.2
  Top Layer w0.508: SD1.4 7.055,48.888 6.172,48.006 ; R32.1 15.5,20.441 9.627,26.314 ; J1.1 17.272,35.408 17.399,35.535 v2(17.399,36.347) 13.335,40.411 7.595,40.411 ; C21.2 17.938,68.002 ; R33.1 21.399,16.231 21.399,9.107 21.641,8.865 ; D4.A@25.41,64.605 18.929,58.125 ; C3.1 27.203,30.842 27.33,30.715 v2(27.33,30.175) ; v2@28.854,30.149 v2(28.854,30.175) 28.854,33.984 29.849,34.978 R19.2 29.98,34.983 31.724,34.983 R18.2 31.728,38.085 32.124,38.481 C16.2 C15.2 37.859,38.481 38.296,38.918 38.296,40.705 38.942,41.351 L1.2 40.869,41.374 40.869,44.171 41.611,44.913 C6.2@43.086,44.913 ; J9.3 29.366,11.064 27.953,9.652 ; C10.2 31.942,58.125 18.929,58.125 ; J8.3 40.432,11.064 39.019,9.652 ; L2.1 v2(46.253,70.728) 47.846,70.728 50.406,73.289 R14.2 50.408,73.413 45.459,73.413 40.132,78.74 ; C6.2 C6.2@43.086,44.913 ; C7.2 43.932,66.43 45.04,66.43 v2(45.564,66.954) ; C4.2 48.298,39.579 49.898,39.579 C29.2 50.123,39.573 v2(51.816,39.573) ; U4.6 48.298,41.494 48.127,41.665 47.286,41.665 46.888,42.062 46.888,45.267 ; C11.2 46.888,45.267 ; J7.3 51.498,11.064 50.085,9.652 ; C8.2@52.75,51.055 C8.2 52.929,51.235 56.972,55.277 56.972,74.066 56.972,75.202 56.76,75.414 ; C9.2 53.936,58.303 55.204,58.303 v2(55.22,58.318) ; v2(54.051,39.573) 54.525,39.1 R17.2 ; v2(55.855,65.049) 55.855,73.273 R15.2 55.998,73.289 56.744,74.035 56.744,74.066 56.76,74.082 56.76,75.202 56.76,75.414 ; R34.2@57.525,13.081 54.096,9.652 50.085,9.652 ; v2(57.683,15.011) 57.683,13.431 R34.2 ; R35.2 60.256,18.373 59.241,18.373 v2(59.004,18.136) 59.004,20.726 J3.1 ; 6.172,48.006 6.172,57.175 7.122,58.125 15.697,58.125 ; 6.172,48.006 6.172,41.834 7.595,40.411 ; 7.595,40.411 5.969,38.786 5.969,36.881 6.357,36.492 9.058,36.492 9.627,35.923 9.627,26.314 ; 9.627,26.314 9.627,7.417 11.049,5.994 14.641,5.994 15.517,5.118 19.804,5.118 21.641,6.955 21.641,8.865 ; 15.697,58.125 18.929,58.125 ; 15.697,58.125 17.348,59.776 17.348,67.412 17.938,68.002 ; 17.938,68.002 19.166,69.229 19.166,76.922 20.983,78.74 40.132,78.74 ; 21.641,8.865 22.428,9.652 27.953,9.652 ; 27.953,9.652 39.019,9.652 ; 39.019,9.652 50.085,9.652 ; 40.132,78.74 53.434,78.74 56.76,75.414 ; C6.2@43.086,44.913 43.213,44.786 44.44,44.786 44.507,44.718 45.015,44.718 45.564,45.267 46.888,45.267
  Bottom Layer w0.254: v1(27.051,72.585) 27.911,73.445 27.911,73.605 v1(27.939,73.633)
  Bottom Layer w0.508: v2(17.399,36.347) 17.551,36.347 23.724,30.175 v2(27.33,30.175) v2(28.854,30.175) ; v2(45.564,66.954) 45.564,70.039 v2(46.253,70.728) ; v2(51.816,39.573) v2(54.051,39.573) ; v2(55.22,58.318) 55.855,58.953 v2(55.855,65.049) ; v2(57.683,15.011) 59.004,16.332 v2(59.004,18.136)
12V: C2.2 J6.4 R1.2 R2.2 R3.2 R4.2 R5.2 U1.1 | length 51.2
  Top Layer w0.254: 27.055,22.987 27.534,22.508 27.534,20.63 R5.2@28.429,19.735 ; R5.2 R5.2@28.429,19.735 ; 28.556,23.52 R4.2 ; U1.1 32.567,22.589 ; R3.2 R1.2 R2.2 43.059,18.125 42.18,17.247 27.44,17.247 27.291,17.395 27.291,18.597 R5.2@28.429,19.735
  Top Layer w0.381: J6.4 15.601,26.846 15.824,26.623 15.824,24.511 17.348,22.987 27.055,22.987 27.588,23.52 28.556,23.52 31.585,23.52 31.635,23.47 C2.2 31.775,23.343 31.966,23.152 32.004,23.152 32.567,22.589
12VP: C1.2 C13.1 C14.1 D1.K R6.2 TP1.1 U1.10 U5.4 U5.5 | length 20.2
  Top Layer w0.254: U1.10 35.567,22.5 C1.2@36.41,23.343
  Top Layer w0.508: U5.5 36.587,30.866 36.885,30.569 37.173,30.569 37.516,30.226 C14.1 ; R6.2 36.893,22.987 36.664,23.216 36.537,23.216 36.41,23.343 C1.2 36.41,26.231 D1.K 36.468,28.568 37.516,29.616 C14.1 ; TP1.1 39.375,26.487 39.375,29.771 C13.1 C14.1
B1: J13.1 R32.2 U3.84 | length 74.5
  Top Layer w0.254: J13.1 16.782,18.907 R32.2 17.605,18.085 24.943,18.085 26.908,16.119 43.602,16.119 45.39,17.907 45.39,42.547 45.195,42.742 44.88,43.056 44.842,43.056 44.769,43.129 v1(44.729,43.129) ; U3.84 37.345,52.365 39.438,52.365 v1(39.519,52.284)
  Bottom Layer w0.254: v1(39.519,52.284) 39.487,52.252 39.487,52.212 43.425,48.274 43.425,45.018 44.729,43.713 v1(44.729,43.129)
B2: J12.1 R33.2 U3.85 | length 80.6
  Top Layer w0.254: J12.1 16.074,9.966 17.487,11.379 18.821,11.379 19.685,12.243 R33.2 19.685,17.323 20.066,17.704 24.714,17.704 26.695,15.723 43.789,15.723 45.771,17.704 45.771,42.73 44.902,43.598 44.208,43.598 v1(44.205,43.596) ; U3.85 37.598,51.911 v1(39.146,51.911)
  Bottom Layer w0.254: v1(39.146,51.911) 39.178,51.943 39.218,51.943 43.044,48.116 43.044,44.789 44.205,43.628 v1(44.205,43.596)
B3: J10.1 R34.1 U3.86 | length 56.2
  Top Layer w0.254: v1(36.189,48.565) 36.189,49.795 U3.86 ; v1(54.331,31.582) 57.785,28.128 57.785,17.444 59.182,16.047 59.182,13.646 59.366,13.462 R34.1 59.366,11.978 62.364,8.98 62.364,8.339 62.737,7.966 J10.1
  Bottom Layer w0.254: v1(36.189,48.565) 36.206,48.565 50.594,34.177 51.736,34.177 v1(54.331,31.582)
B4: J11.1 R35.1 U3.87 | length 48.9
  Top Layer w0.254: v1(36.645,48.829) 36.645,49.511 37.539,50.405 U3.87 ; v1(54.331,32.309) 58.166,28.473 58.166,17.602 58.855,16.913 R35.1 63.981,16.913 J11.1
  Bottom Layer w0.254: v1(36.645,48.829) 36.674,48.829 50.597,34.907 51.733,34.907 v1(54.331,32.309)
BOOT: R16.1 U3.94 | length 4.1
  Top Layer w0.254: R16.1 38.329,46.279 U3.94
"BUS SEL": J5.8 U3.69 | length 17.7
  Top Layer w0.254: J5.8 31.737,74.659 31.737,74.114 32.4,73.451 v1(32.4,72.809) ; v1(32.41,68.834) 32.41,62.001 U3.69
  Bottom Layer w0.254: v1(32.4,72.809) 32.407,72.803 32.407,68.837 v1(32.41,68.834)
"BUS STATE": J5.9 U3.70 | length 18.1
  Top Layer w0.254: J5.9 31.214,74.018 31.739,73.494 v1(31.739,73.471) ; v1(31.739,69.52) 31.739,61.965 U3.70
  Bottom Layer w0.254: v1(31.739,69.52) v1(31.739,73.471)
"CAN GLV RX": R12.1 TP4.1 U2.4 U3.95 | length 30
  Top Layer w0.254: R12.1 24.2,33.853 25.229,32.824 U2.4 26.794,31.955 27.737,32.897 27.737,33.853 ; TP4.1 27.691,33.807 27.737,33.853 ; U3.95@40.03,47.295 37.236,44.501 30.602,44.501 27.737,41.636 27.737,33.853
"CAN GLX TX": R11.1 TP6.1 U2.1 U3.96 | length 42.3
  Top Layer w0.254: TP6.1 25.269,35.506 R11.1 24.199,35.379 23.317,34.496 23.317,29.582 24.754,28.145 U2.1 27.291,28.145 28.118,28.972 28.118,41.478 30.759,44.12 37.592,44.12 U3.96@40.742,47.269
"CAN MAIN H": D2.1 J6.3 R13.1 TP5.1 U2.7 | length 24.2
  Top Layer w0.254: TP5.1 9.347,38.481 10.16,37.668 10.16,29.598 10.911,28.846 17.969,28.846 D2.1 ; R13.1 18.12,25.619 D2.1 ; U2.7 19.354,29.415 19.181,29.242 19.181,29.227 18.951,28.997 D2.1
"CAN MAIN L": D2.2 J2.1 J6.2 TP3.1 U2.6 | length 25.2
  Top Layer w0.254: TP3.1 11.445,38.481 10.592,37.628 10.592,31.496 11.242,30.846 J6.2 18.069,30.846 D2.2 19.143,30.897 19.354,30.685 U2.6 20.304,30.685 23.571,27.418 J2.1
"CAN MAIN LED": DS5.1 DS6.1 J1.2 | length 3.3
  Top Layer w0.254: J1.2 17.282,33.95 DS6.1 DS5.1
"CAN MAIN RX LED": DS6.2 R12.2 | length 2.1
  Top Layer w0.254: DS6.2 20.531,33.98 R12.2
"CAN MAIN TX LED": DS5.2 R11.2 | length 2.1
  Top Layer w0.254: DS5.2 R11.2
"CHIP SEL": J5.12 U3.29 | length 34.4
  Top Layer w0.254: J5.12 29.737,74.659 29.737,73.683 34.911,68.509 45.827,68.509 46.749,68.509 53.221,62.037 53.221,61.116 53.221,59.049 U3.29
CLMODE: R7.2 U1.4 | length 3.6
  Top Layer w0.254: R7.2 30.111,18.303 31.616,19.808 U1.4 32.544,19.785 32.16,19.785
DATA/CMD: J5.11 U3.26 | length 38.3
  Top Layer w0.254: J5.11 30.237,74.659 30.237,73.791 35.139,68.89 46.907,68.89 56.083,59.713 56.083,57.81 55.292,57.019 53.405,57.019 53.375,57.049 53.342,57.049 U3.26
FLAG: DS2.2 U1.6 | length 3.1
  Top Layer w0.254: U1.6 36.318,19.308 37.109,18.517 DS2.2
GND: C1.1 C2.1 C3.2 C4.1 C5.1 C6.1 C7.1 C8.1 C9.1 C10.1 C11.1 C13.2 C14.2 C15.1 C16.1 C17.1 C18.1 C19.1 C20.1 C22.1 C23.1 C24.1 C25.1 C26.1 C27.1 C28.1 C29.1 D1.A D2.3 D3.A D5.K DS3.2 DS4.2 DS9.2 J3.3 J3.5 J3.9 J5.17 J6.1 J7.1 J8.1 J9.1 J10.2 J11.2 J12.2 J13.2 P1.3 R7.1 R8.1 R9.1 R10.1 R16.2 R20.1 R30.2 R31.1 SD1.6 SD1.9 SD1.10 SD1.11 SD1.12 SW1.1 TP2.1 U1.9 U1.11 U2.2 U3.10 U3.13 U3.20 U3.21 U3.27 U3.74 U4.3 U5.2 | length 79.1
  Top Layer w0.254: SD1.12 9.826,43.1 v1(9.83,43.104) ; SD1.9 9.855,55.64 v1(9.855,54.508) ; v1(11.074,51.11) 12.404,51.11 SD1.6 ; v1(11.1,32.842) 11.103,32.845 J6.1@13.314,32.845 ; v1(11.151,7.95) 11.166,7.966 J12.2@13.315,7.966 ; v1(11.151,16.916) 11.16,16.907 J13.2@13.315,16.907 ; D2.3 16.145,29.921 v1(16.904,29.921) ; v1(18.085,54.61) 18.085,55.576 18.059,55.601 SD1.10 ; v1(18.11,43.104) 18.11,41.935 SD1.11 ; C28.1 20.664,71.574 v1(20.684,71.594) ; C26.1 20.035,73.076 v1(20.612,73.076) ; v1(23.074,49.988) 23.074,50.522 C17.1 ; C25.1 v1(23.074,70.648) ; D5.K v1(23.38,66.023) ; C27.1 v1(24.613,70.648) ; v1(24.923,49.988) C18.1 ; U2.2 26.992,29.415 C3.2 ; v1@25.349,10.389 25.366,10.405 J9.1 ; C24.1@26.151,70.017 v1(26.151,70.695) ; v1(26.773,49.988) C19.1 ; J5.17 27.229,74.697 v2(27.229,75.387) ; C22.1 v1(27.674,70.695) ; R7.1 v1(29.201,18.176) ; C23.1 v1(29.201,70.657) ; R9.1 v1(30.08,20.39) ; R8.1 v1(30.08,25.095) ; DS9.2 31.557,30.347 R20.1 31.885,30.019 v1(32.911,30.019) ; C10.1 v1(31.369,58.877) ; v1(32.141,40.818) C16.1 ; D1.A v1(34.093,26.289) ; v1@32.923,29.997 32.949,29.997 33.025,29.921 C14.2 ; v1(33.025,32.817) 33.045,32.797 U5.2 ; v1(33.198,58.141) 33.226,58.113 33.226,57.682 34.003,56.905 U3.74 ; C2.1 v1(34.093,23.47) C1.1 ; v1(34.067,21.908) U1.11 34.567,20.808 U1.9 ; R16.2 v1(35.567,46.279) ; C20.1 v1(35.064,71.873) ; v1(35.697,40.818) C15.1 ; v1(36.424,10.287) 36.432,10.295 J8.1 ; R31.1 38.13,73.361 38.384,73.615 38.874,73.615 v1(38.892,73.633) ; v1(39.141,21.463) R10.1 ; v1(40.367,72.643) R30.2 ; C7.1 42.336,66.421 v1(43.044,66.421) ; C13.2 43.044,30.383 v1(43.044,31.451) D3.A ; v1(42.774,43.967) 42.774,43.765 C6.1 ; DS3.2 v1(42.85,23.635) DS4.2 ; v2(46.812,50.394) 46.812,49.753 47.509,49.056 U3.10 47.509,48.991 48.152,48.348 48.152,47.564 47.751,47.163 v1(47.751,47.144) ; v1(47.498,10.287) J7.1 ; v2(47.752,50.876) 48.544,50.084 U3.13 ; C4.1 v1(48.057,38.583) ; v1(49.384,43.519) U4.3 ; v1(50.041,47.256) 50.562,46.734 C11.1 ; C29.1 v1(50.117,38.583) ; U3.20 50.041,53.563 50.041,53.845 v1(50.013,53.873) 50.437,53.873 U3.21 ; v1(51.324,55.735) 51.398,55.809 51.398,55.812 U3.27 ; v1(53.492,50.492) C8.1 ; v1(54.051,59.334) 54.788,59.334 C9.1 ; C5.1 v1(64.262,37.325) ; J10.2 66.176,9.966 v1(66.192,9.982) ; J11.2 66.179,18.907 v1(66.192,18.893) ; SW1.1 v1(64.532,31.673)
  Top Layer w0.508: TP2.1 42.816,26.611 42.816,24.367 DS4.2
  Bottom Layer w0.254: v1(32.911,30.019) 32.911,30.009 v1@32.923,29.997 ; v1(53.492,50.492) v1@53.492,50.521
  other v1: 25.349,10.287 26.37,29.415
NetC20_2: C20.2 J5.5 | length 2.9
  Top Layer w0.254: J5.5 33.237,74.659 33.237,74.25 33.897,73.59 34.484,73.003 34.81,73.003 C20.2
NetC21_1: C21.1 D5.A D6.K | length 5
  Top Layer w0.254: C21.1 20.949,66.415 D6.K 21.387,66.599 22.745,67.957 22.745,68.004 23.126,68.385 D5.A
NetC23_2: C23.2 J5.18 | length 4.2
  Top Layer w0.254: J5.18 26.737,74.659 26.737,73.955 29.074,71.619 C23.2
NetC24_2: C24.2 J5.20 | length 3.2
  Top Layer w0.254: J5.20 25.714,73.025 26.151,72.589 C24.2
NetC25_2: C25.2 J5.22 | length 3.8
  Top Layer w0.254: C25.2 23.201,71.609 24.714,73.122 J5.22
NetC26_2: C26.2 J5.24 | length 2.9
  Top Layer w0.254: C26.2 21.672,73.177 22.467,73.177 23.691,74.401 23.691,74.659 J5.24
NetC27_2: C27.2 D4.K J5.21 | length 7.5
  Top Layer w0.254: J5.21 25.214,73.084 24.613,72.482 C27.2 24.74,71.609 25.375,70.974 25.375,69.56 25.664,69.271 D4.K
NetC28_2: C28.2 D6.A J5.23 | length 6.1
  Top Layer w0.254: D6.A 21.133,71.003 21.577,71.447 C28.2 21.577,71.701 21.831,71.955 21.958,71.955 24.191,74.189 24.191,74.659 J5.23
NetDS1_1: DS1.1 R1.1 | length 1.6
  Top Layer w0.254: DS1.1 41.394,19.861 R1.1
NetDS2_1: DS2.1 R2.1 | length 1.7
  Top Layer w0.254: DS2.1 41.218,18.517 41.472,18.263 R2.1
NetDS3_1: DS3.1 R3.1 | length 1.7
  Top Layer w0.254: DS3.1 41.472,22.79 R3.1
NetDS4_1: DS4.1 R6.1 | length 2.1
  Top Layer w0.254: R6.1 39.833,23.114 40.735,24.016 41.008,24.016 DS4.1
NetDS7_1: DS7.1 R14.1 | length 1.8
  Top Layer w0.254: R14.1 52.222,74.875 DS7.1
NetDS8_1: DS8.1 R15.1 | length 1.8
  Top Layer w0.254: DS8.1 55.765,74.982 R15.1
NetDS9_1: DS9.1 R19.1 | length 1.6
  Top Layer w0.254: R19.1 30.204,33.163 DS9.1
NetJ2_2: J2.2 R13.2 | length 2.4
  Top Layer w0.254: R13.2 22.468,25.552 22.9,25.121 23.317,25.121 J2.2
NetJ5_2: J5.2 Q1.2 R30.1 | length 7.5
  Top Layer w0.254: J5.2 34.737,74.659 34.737,74.25 34.959,74.028 37.159,74.028 37.389,73.798 37.389,72.531 38.039,71.881 Q1.2 38.892,71.816 39.592,72.516 R30.1
NetJ5_3: J5.3 Q1.3 R31.2 | length 4.7
  Top Layer w0.254: J5.3 34.237,74.659 34.237,74.211 34.977,73.471 35.59,73.471 35.827,73.234 R31.2 36.739,73.039 Q1.3
NetL2_2: L2.2 Q1.1 | length 2.7
  Top Layer w0.254: Q1.1 39.005,69.916 39.717,70.628 L2.2
NRST: C5.2 J3.10 R17.1 SW1.2 U3.14 | length 29.1
  Top Layer w0.254: U3.14 48.923,50.414 51.867,47.471 v1(51.867,47.447) ; v1(53.797,45.593) 58.995,40.395 63.637,40.395 64.292,39.74 64.292,39.269 64.461,39.1 R17.1 C5.2 65.223,37.198 65.477,36.944 66.036,36.944 66.786,36.195 ; SW1.2@64.565,35.662 SW1.2 65.702,35.628 66.269,36.195 66.786,36.195 ; J3.10 66.786,36.195
  Bottom Layer w0.254: v1(51.867,47.447) 53.693,45.621 53.769,45.621 v1(53.797,45.593)
"ORANGE LED 1": DS7.2 U3.42 | length 13.4
  Top Layer w0.254: U3.42 v1(48.569,63.59) ; v1(51.044,66.116) 52.328,67.4 DS7.2
  Bottom Layer w0.254: v1(48.569,63.59) 48.569,63.616 51.044,66.09 v1(51.044,66.116)
"ORANGE LED 2": DS8.2 U3.41 | length 14.5
  Top Layer w0.254: U3.41 49.277,63.59 49.384,63.59 49.384,63.649 v1(49.356,63.676) ; v1(51.562,65.888) 54.107,68.433 DS8.2
  Bottom Layer w0.254: v1(49.356,63.676) 51.562,65.883 v1(51.562,65.888)
"OSC IN": U3.12 U4.4 | length 10.6
  Top Layer w0.254: U3.12 49.208,48.738 49.672,48.738 51.482,46.929 51.482,45.614 51.181,45.314 48.793,45.314 48.298,44.818 U4.4
OVLO: R5.1 R9.2 U1.3 | length 4.4
  Top Layer w0.254: R5.1 R9.2 30.969,21.322 31.959,20.331 32.544,20.331 U1.3
POT-L: J7.2 U3.17 | length 42
  Top Layer w0.254: J7.2 49.498,16.795 53.153,20.45 53.153,48.329 U3.17
POT-M: J8.2 U3.16 | length 50.3
  Top Layer w0.254: J8.2 38.432,13.564 39.75,14.883 47.014,14.883 52.772,20.641 52.772,48.003 U3.16
POT-R: J9.2 U3.15 | length 61.1
  Top Layer w0.254: J9.2 27.366,14.488 28.169,15.291 46.883,15.291 52.391,20.798 52.391,47.677 U3.15
"PWR CB 3V3": C12.1 U5.1 | length 2
  Top Layer w0.254: U5.1 34.287,34.613 34.98,35.306 C12.1
"PWR FB 3V3": R18.1 R20.2 U5.3 | length 4.3
  Top Layer w0.254: R18.1 31.728,31.762 R20.2 31.865,31.847 U5.3
"PWR SW 3V3": C12.2 D3.K L1.1 U5.6 | length 9
  Top Layer w0.508: C12.2 36.566,33.768 U5.6 36.639,33.695 37.817,33.695 38.644,32.867 D3.K 39.044,35.244 39.69,35.89 L1.1
RESET: J5.10 U3.25 | length 39.8
  Top Layer w0.254: J5.10 30.737,74.659 30.737,73.83 35.297,69.271 47.064,69.271 56.464,59.871 56.464,57.607 53.014,54.157 52.982,54.157 U3.25
SD_CMD: SD1.3 U3.83 | length 25.4
  Top Layer w0.254: SD1.3 v1(27.153,47.788) ; v1(32.468,48.266) 32.496,48.294 32.567,48.294 U3.83
  Bottom Layer w0.254: v1(27.153,47.788) 31.99,47.788 v1(32.468,48.266)
SD_D0: SD1.7 U3.65 | length 31.2
  Top Layer w0.254: SD1.7 14.064,52.188 14.783,52.907 28.761,52.907 31.276,55.423 32.4,55.423 32.461,55.362 v1(32.461,55.35) ; v1(36.543,55.424) 36.571,55.452 36.76,55.452 37.939,56.63 37.939,59.301 U3.65
  Bottom Layer w0.254: v1(32.461,55.35) 36.43,55.35 36.504,55.424 v1(36.543,55.424)
SD_D1: SD1.8 U3.66 | length 29.7
  Top Layer w0.254: SD1.8 28.603,53.288 31.118,55.804 32.4,55.804 32.461,55.865 v1(32.461,55.877) ; v1(36.543,55.951) 37.558,56.965 37.558,58.975 U3.66
  Bottom Layer w0.254: v1(32.461,55.877) 36.43,55.877 36.504,55.951 v1(36.543,55.951)
SD_D2: SD1.1 U3.78 | length 25.6
  Top Layer w0.254: SD1.1 26.835,45.588 29.513,48.266 31.731,50.484 v1(31.746,50.484) ; v1(32.385,51.613) 32.385,51.63 34.357,53.602 U3.78
  Bottom Layer w0.254: v1(31.746,50.484) 31.746,50.5 32.357,51.11 32.357,51.585 v1(32.385,51.613)
SD_D3: SD1.2 U3.79 | length 25
  Top Layer w0.254: SD1.2 27.308,46.688 31.725,51.105 32.549,51.105 U3.79
SDIO_CK: SD1.5 U3.80 | length 25
  Top Layer w0.254: SD1.5@12.699,50.261 SD1.5 20.412,49.988 22.276,51.852 30.856,51.852 31.785,52.781 v1(32.385,52.781) ; v1(34.003,51.852) U3.80
  Bottom Layer w0.254: v1(32.385,52.781) 33.314,51.852 v1(34.003,51.852)
"SERIAL CLK": J5.13 U3.30 | length 34.1
  Top Layer w0.254: J5.13 29.237,74.659 29.237,73.633 34.742,68.128 45.67,68.128 46.591,68.128 52.84,61.879 52.84,60.958 52.84,59.375 U3.30
"SERIAL DATA": J5.14 U3.31 | length 33.8
  Top Layer w0.254: J5.14 28.737,74.659 28.737,73.561 34.552,67.747 46.433,67.747 52.459,61.721 52.459,59.701 U3.31
SETI: R10.2 U1.8 | length 3.2
  Top Layer w0.254: U1.8 36.259,20.308 37.414,21.463 R10.2
SWCLK: J3.4 U3.76 | length 44.1
  Top Layer w0.254: U3.76 33.682,54.327 34.325,54.97 v1(39.66,54.97)
  Bottom Layer w0.254: v1(39.66,54.97) 41.106,54.97 53.607,42.469 62.268,33.807 66.7,33.807 J3.4
SWDIO: J3.2 U3.72 | length 44.4
  Top Layer w0.254: U3.72 34.743,57.579 35.526,56.796 v1(36.502,56.796)
  Bottom Layer w0.254: v1(36.502,56.796) 37.006,56.796 39.345,54.458 41.079,54.458 62.11,33.426 ; 62.136,33.426 65.837,33.426 ; 65.811,33.426 J3.2
"TEMP CLK": J5.6 U3.67 | length 16.9
  Top Layer w0.254: J5.6 32.737,74.659 32.737,74.211 33.9,73.048 v1(33.9,71.574) ; v1(33.909,67.513) 33.909,61.916 U3.67
  Bottom Layer w0.254: v1(33.9,71.574) 33.9,67.522 v1(33.909,67.513)
"TEMP DATA": J5.7 U3.68 | length 17.3
  Top Layer w0.254: J5.7 32.237,74.659 32.237,74.153 33.198,73.193 v1(33.198,72.238) ; v1(33.214,68.385) 33.214,61.904 U3.68
  Bottom Layer w0.254: v1(33.198,72.238) 33.198,68.402 v1(33.214,68.385)
USART3_RX: P1.2 U3.48 | length 17.7
  Top Layer w0.254: U3.48 45.034,64.321 46.174,65.461 v1(46.174,65.485)
  Bottom Layer w0.254: v1(46.174,65.485) 46.181,65.485 50.103,69.407 P1.2
USART3_TX: P1.1 U3.47 | length 16.4
  Top Layer w0.254: U3.47 U3.47 46.535,65.092 v1(46.535,65.094)
  Bottom Layer w0.254: v1(46.535,65.094) 48.308,66.867 P1.1
"USB DM": U3.53
"USB DP": U3.54
"USB M": 
"USB P": 
USB_D6: U3.52
UVLO: R4.1 R8.2 U1.2 | length 4.8
  Top Layer w0.254: R4.1 R8.2 30.207,22.774 32.15,20.831 32.544,20.831 U1.2
UVOV: DS1.2 U1.7 | length 2.8
  Top Layer w0.254: U1.7 38.301,19.808 DS1.2
VUSB: 
pads on no net: FID1.1 FID2.1 FID3.1 FID4.1 J3.6 J3.7 J3.8 J5.1 J5.4 J5.MP1 J5.MP2 J6.5 J6.6 J7.4 J7.5 J8.4 J8.5 J9.4 J9.5 J10.MP1 J10.MP2 J11.MP1 J11.MP2 J12.MP1 J12.MP2 J13.MP1 J13.MP2 M1.1 M2.1 M3.1 M4.1 U1.5 U2.5 U2.8 U3.1 U3.2 U3.3 U3.4 U3.5 U3.7 U3.8 U3.9 U3.18 U3.23 U3.24 U3.32 U3.33 U3.34 U3.35 U3.36 U3.37 U3.38 U3.39 U3.40 U3.43 U3.44 U3.45 U3.46 U3.49 U3.51 U3.55 U3.56 U3.57 U3.58 U3.59 U3.60 U3.61 U3.62 U3.63 U3.64 U3.71 U3.73 U3.77 U3.81 U3.82 U3.88 U3.89 U3.90 U3.91 U3.92 U3.93 U3.97 U3.98 U3.99 U4.2 U4.5

## Polygon pours and split planes (outlines as drawn)
GND on Bottom Layer "NONET_L02_P001" (solid, remove dead copper, shelved, pour order 1): 5.867,81.991 71.223,81.991 71.223,5.106 5.867,5.106

## Silkscreen, mask and mechanical layers (free items; w line width, h text height)
Top Overlay:
  text "26" at 21.881,73.884 h0.76
  text "1" at 36.334,73.884 h0.76
  text "UART" at 62.357,72.161 h1.52 r270
  text "PROG" at 65.604,40.462 h1.52
Bottom Overlay:
  text "QUTMS Steering Wheel Board V01 / Designed by Jarrod Fisher" at 125.247,34.188 h1.52
Mechanical 1:
  lines w0.254: 5.334,82.448 5.334,82.499 ; 5.385,4.394 5.334,4.394 ; 5.385,82.499 5.334,82.499 ; 5.334,4.394 5.334,82.499 ; 5.334,4.394 71.755,4.394 71.755,82.499 5.334,82.499